# Altium PCB PCB1.PcbDoc
Units mil, origin at the board's own origin, x right, y up, seen from the top; angles counter-clockwise.
Board outline 1000 x 1410 mil, 2 copper layers (Top Layer, Bottom Layer); 26 components, 22 nets, 121 pads, 9 vias.
Unrouted connection lines stored in the file: 48.
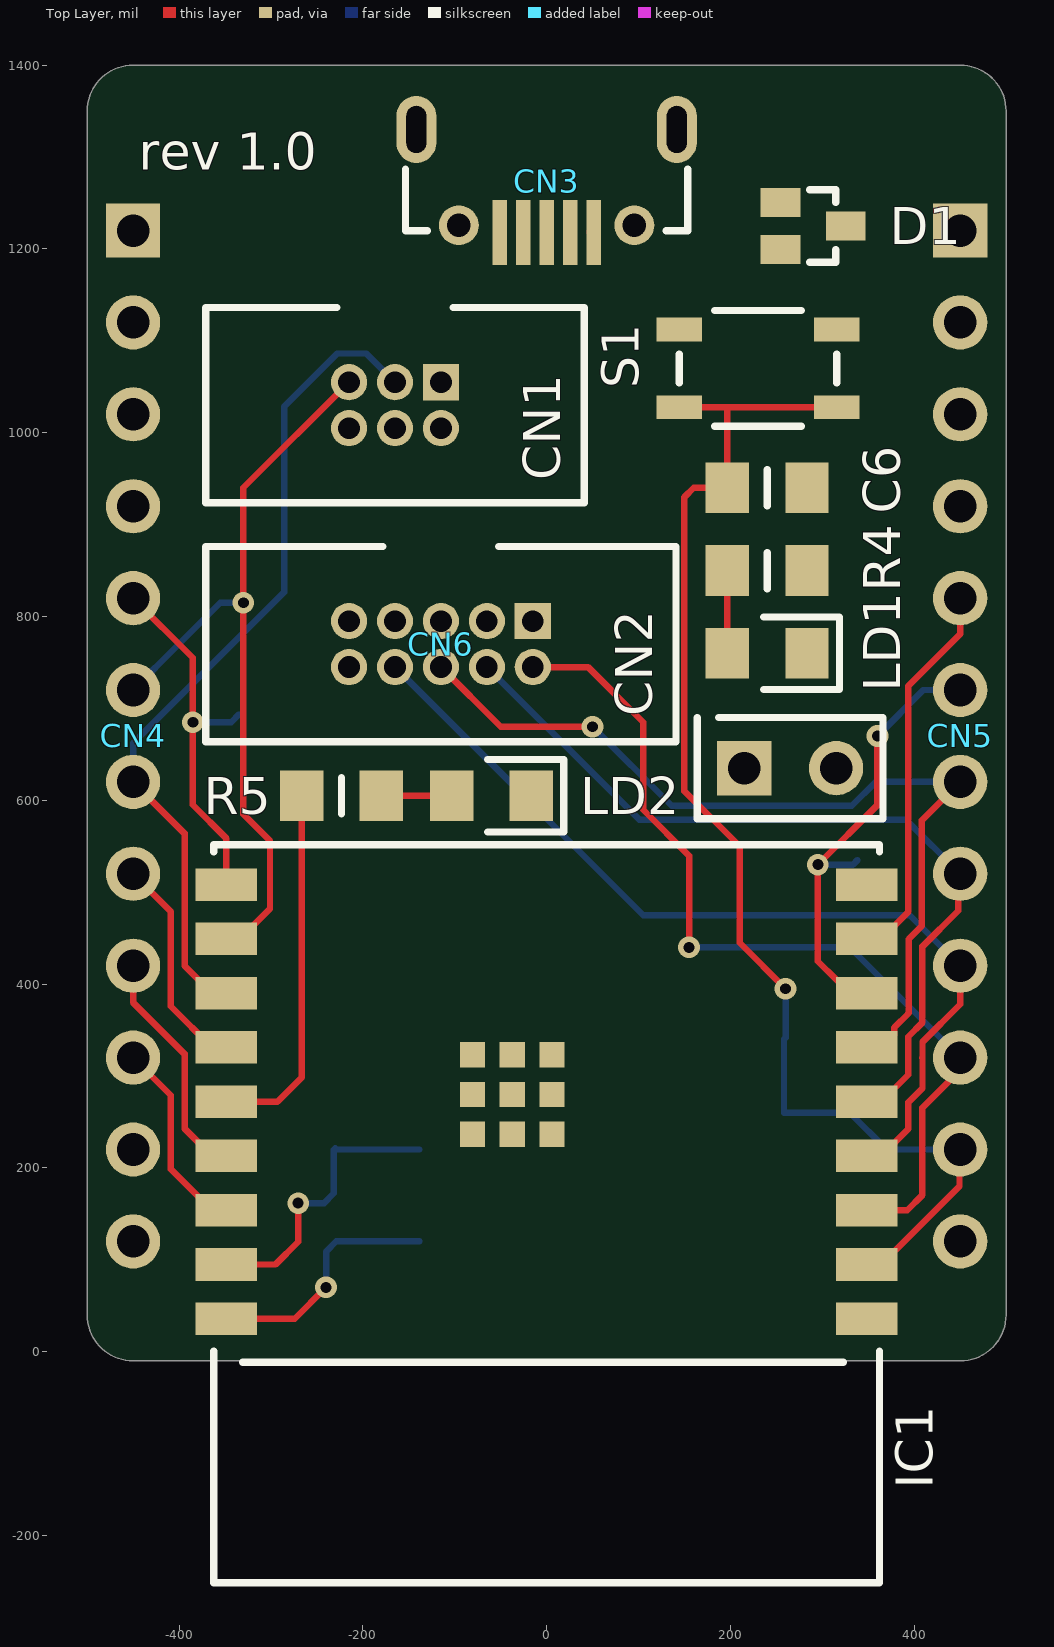
[diagram p0: Top Layer view]
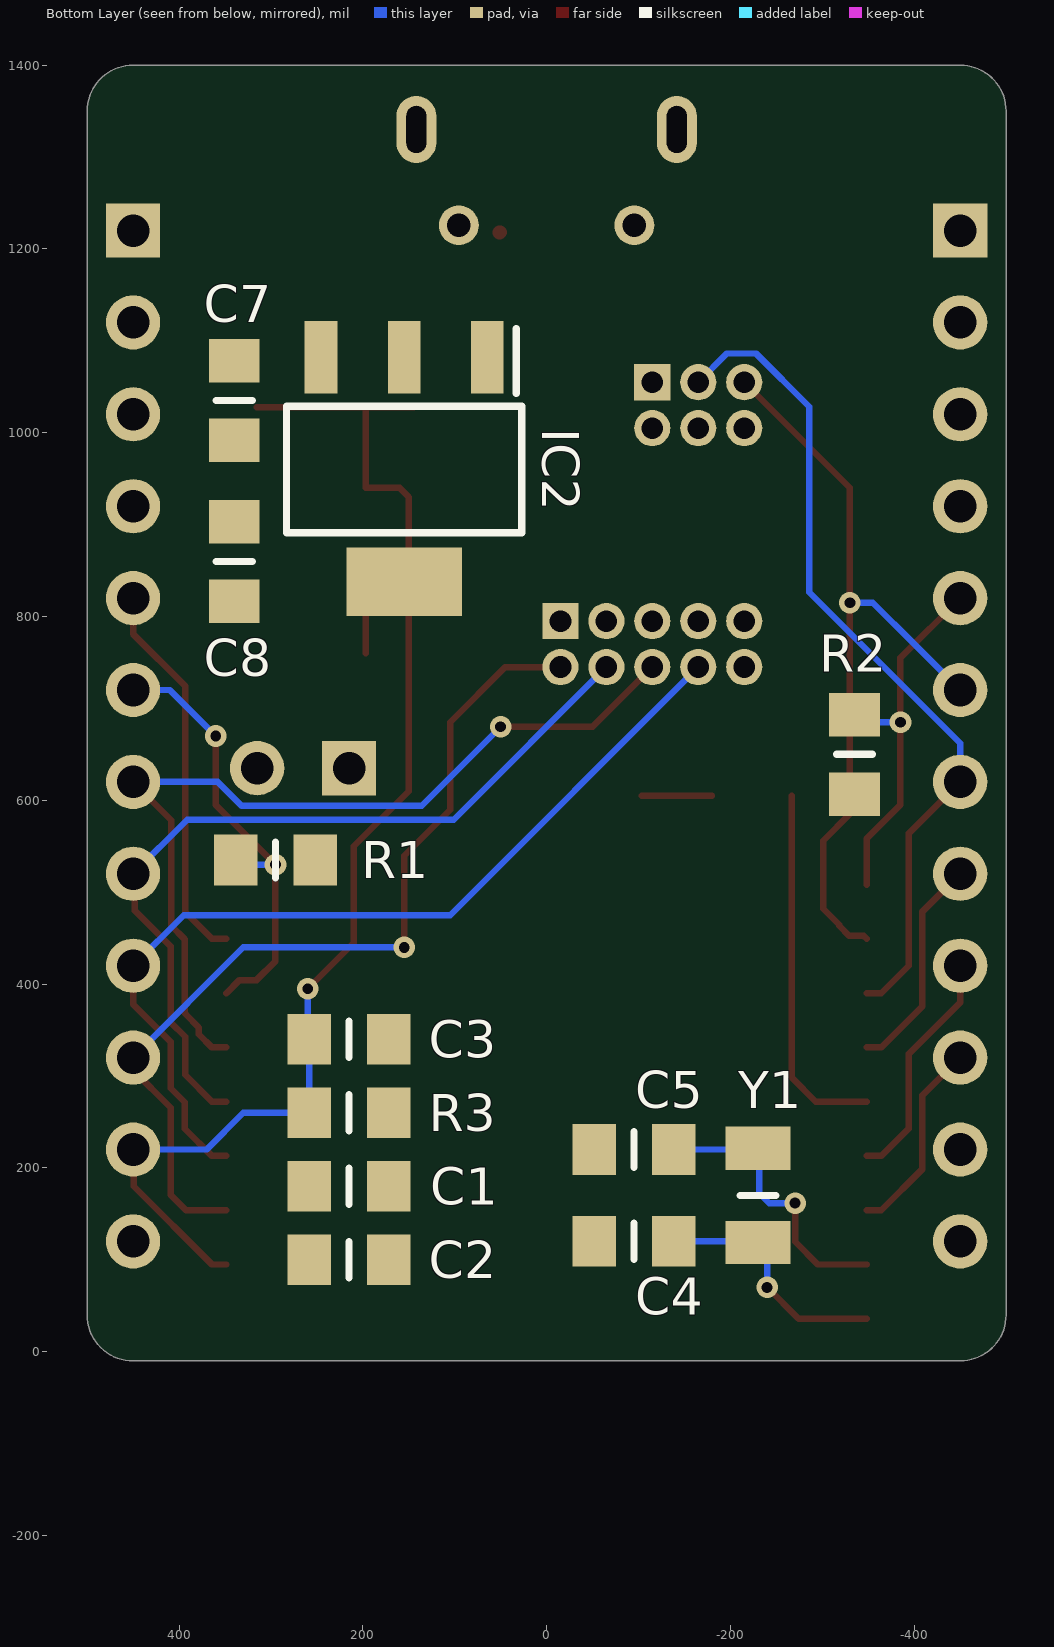
[diagram p1: Bottom Layer view, seen from below]
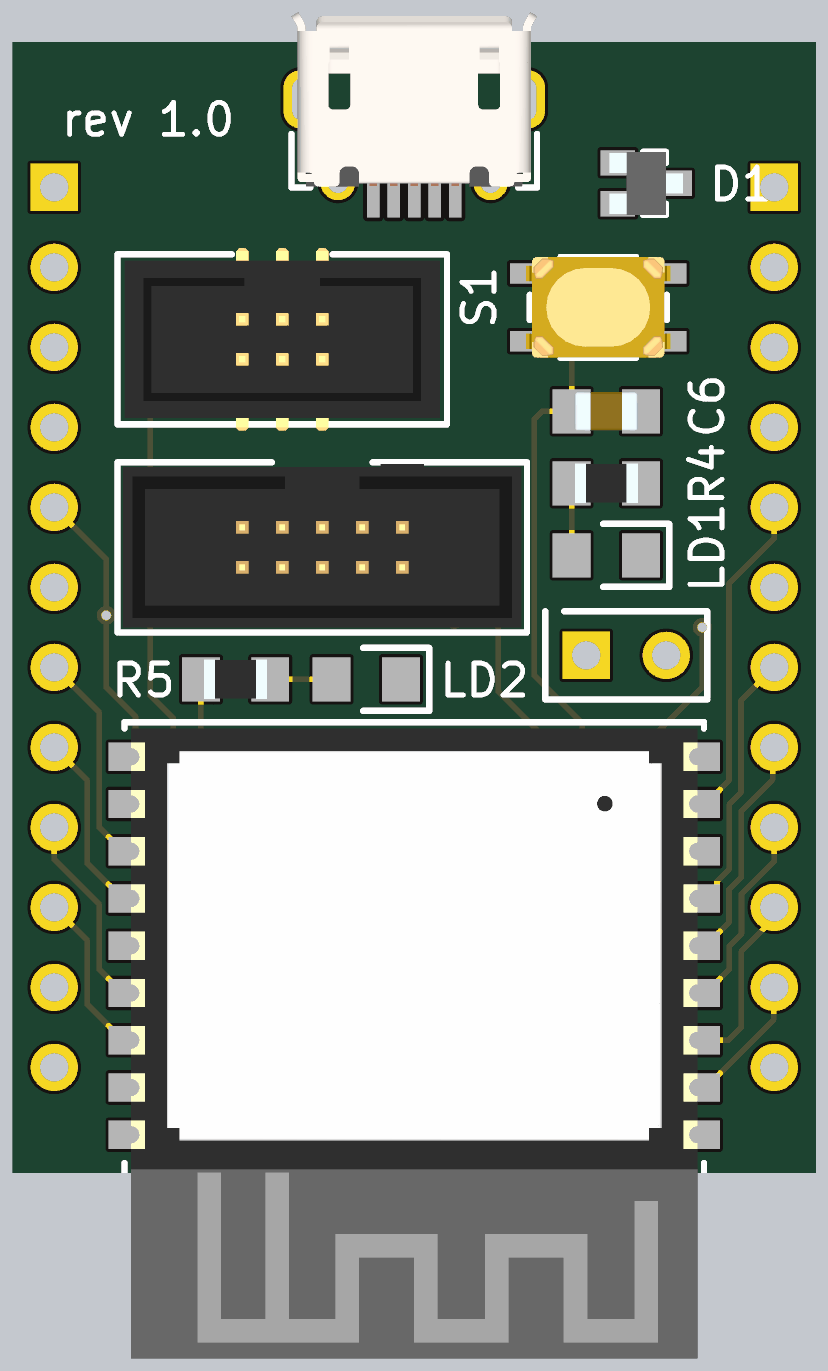
[diagram p2: 3D render of the assembled board from above, using the file's embedded part models]
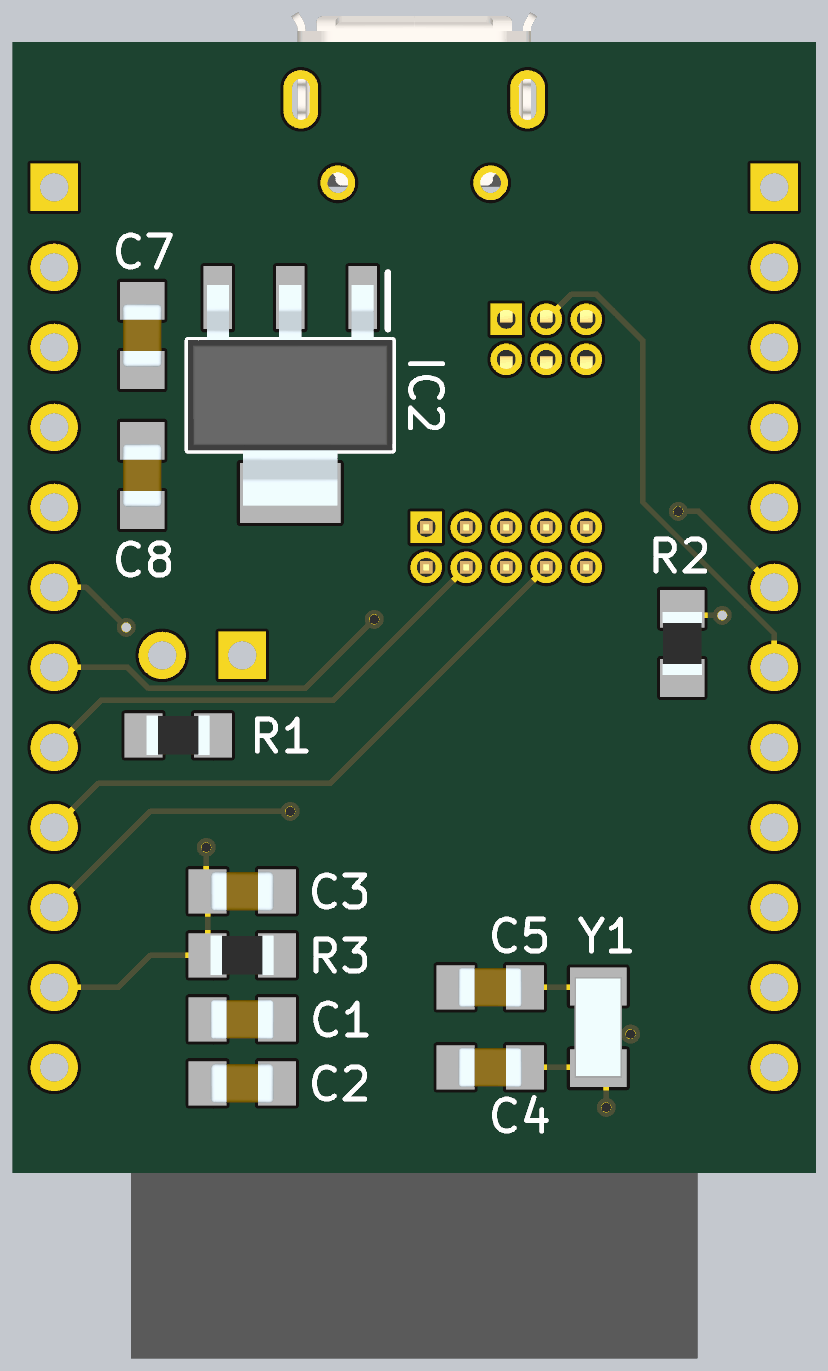
[diagram p3: 3D render of the assembled board from below, using the file's embedded part models]

## Layer stack, top to bottom
Top Solder: solder mask 0.4, Solder Resist, Dk 3.5
Top Layer: signal copper 1.4
Dielectric 1: dielectric 12.6, FR-4, Dk 4.8
Bottom Layer: signal copper 1.4
Bottom Solder: solder mask 0.4, Solder Resist, Dk 3.5

## Board outline
-500,40 -500,1350 cw(c-450,1350) -450,1400 450,1400 cw(c450,1350) 500,1350 500,40 cw(c450,40) 450,-10 -450,-10 cw(c-450,40)

## Design rules (kind name [scope] priority, off if disabled: settings)
BoardOutlineClearance [All] p1: gap=7.87 ignorepadtopadclearanceinfootprint=FALSE except(15.75: Arc-SplitBarrior Arc-SplitContinuation Track-SplitBarrior Track-SplitContinuation SMDPad-SplitBarrior SMDPad-SplitContinuation THPad-SplitBarrior THPad-SplitContinuation Via-SplitBarrior Via-SplitContinuation Fill-SplitBarrior Fill-SplitContinuation Poly-SplitBarrior Poly-SplitContinuation Region-SplitBarrior Region-SplitContinuation Text-SplitBarrior Text-SplitContinuation)
Clearance "Clearance Bottom Layer" [OnLayer('Bottom Layer')] p1: gap=8 ignorepadtopadclearanceinfootprint=TRUE except(10: Arc-Text Track-Text SMDPad-Text THPad-Text Via-Text Fill-Text Poly-Text Region-Text Text-Text)
Clearance "Clearance Top Layer" [OnLayer('Top Layer')] p2: gap=8 ignorepadtopadclearanceinfootprint=TRUE except(10: Arc-Text Track-Text SMDPad-Text THPad-Text Via-Text Fill-Text Poly-Text Region-Text Text-Text)
Clearance [All] p3: gap=7.87 ignorepadtopadclearanceinfootprint=FALSE except(3.5: Arc-Arc Arc-Track Arc-SMDPad Track-Track Track-SMDPad SMDPad-SMDPad; 5: Arc-Via Track-Via SMDPad-Via THPad-Via Via-Via; 10: Arc-Text Track-Text SMDPad-Text THPad-Text Via-Text Fill-Text Poly-Text Region-Text Text-Text)
HoleSize [All] p1: absolutevalues=TRUE maxlimit=248.03 minlimit=7.87 maxpercent=80.000 minpercent=20.000
MinimumAnnularRing [All] p1: minimumring=3
MinimumSolderMaskSliver [All] p1: minsoldermaskwidth=3.94
PolygonConnect PolygonConnect_1 [All] p1: thpad.connectstyle=Relief thpad.reliefconductorwidth=20 thpad.reliefentries=4 thpad.polygonreliefangle="90 Angle" thpad.airgapwidth=10 smdpad.connectstyle=Relief smdpad.reliefconductorwidth=20 smdpad.reliefentries=4 smdpad.polygonreliefangle="90 Angle" smdpad.airgapwidth=10 via.connectstyle=Direct via.reliefconductorwidth=20 via.reliefentries=4 via.polygonreliefangle="90 Angle" via.airgapwidth=10
RoutingCorners [All] p1: cornerstyle=Round minsetback=100 maxsetback=100
RoutingVias [All] p1: holewidth=11.81 width=19.68 viastyle="Through Hole" minholewidth=7.87 minwidth=17.72 maxholewidth=39.37 maxwidth=78.74
SilkToSilkClearance [All] p1: silktosilkclearance=3.94
SilkToSolderMaskClearance [IsPad] p1: minsilkscreentomaskgap=3.94 clearancetoexposedcopper=TRUE
SolderMaskExpansion [All] p1: expansion=4 istentingtop=FALSE
Width [All] p1: maxlimit=100 minlimit=5 preferedwidth=10 toplayer_prefwidth=7 minimp=50.000000 maximp=50.000000 favimp=50.000000
25 further rules are at their usual default settings.

## Components (designator, comment, footprint, x,y, rotation, side; value= is the part's Value field where it differs from the comment)
C1 "CL21B104KBCNNNC" CAPC2012X94N 215,180 r0 bottom value=100nF
C2 "CL21A106MQFNNNE" CAPC2012X135N 215,100 r0 bottom value=10uF
C3 "CL21B105KBFNNNE" CAPC2012X135N 215,340 r0 bottom value=1uF
C4 "CC0805CRNPO9BN6R8" CAPC2012X94N -95,120 r180 bottom value=6.8pF
C5 "CC0805CRNPO9BN6R8" CAPC2012X94N -95,220 r180 bottom value=6.8pF
C6 "CL21B104KBCNNNC" CAPC2012X94N 240,940 r180 top value=100nF
C7 "CL21B105KBFNNNE" CAPC2012X135N 340,1035 r270 bottom value=1uF
C8 "CL21A475KBQNNNE" CAPC2012X135N 340,860 r90 bottom value=4.7uF
CN1 "CN_2X3_1.27_BOX_1" CN_2X3_1.27_BOX_TH -165,1030 r180 top
CN2 "CN_2PIN" CN_2PIN 215,635 r0 top
CN3 "USB_B_AE" USB_B_AE 0,1330 r180 top
CN4 "CN_12PIN" CN_12PIN -450,1220 r270 top
CN5 "CN_12PIN" CN_12PIN 450,1220 r270 top
CN6 "CN_2X5_1.27_BOX" CN_2X5_1.27_BOX_TH -115,770 r180 top
D1 "RB715UMTL" DAN217UMTL 290,1225 r270 top
IC1 "ESP32-C3-WROOM-02-N4" ESP32C3WROOM02N4 0,150 r180 top
IC2 "AP7361-33ER-13" SOT230P700X180-4N 155,960 r270 bottom value=3.3V
LD1 "LTST-C171KGKT" LEDC2012X85N_G 240,760 r180 top value=Green/20mA
LD2 "LTST-C171KSKT" LEDC2012X85N_Y -60,605 r180 top value=Yellow
R1 "RC0805FR-0710KL" RESC2012X60N 295,535 r0 bottom value=10k
R2 "RC0805FR-0710KL" RESC2012X60N -335,650 r270 bottom value=10k
R3 "RC0805FR-0710KL" RESC2012X60N 215,260 r180 bottom value=10k
R4 "RC0805FR-0710KL" RESC2012X60N 240,850 r180 top value=10k
R5 "RC0805FR-0710KL" RESC2012X60N -223.31,605 r180 top value=10k
S1 "SKRPABE010" PTS815SJM250SMTRLFS 230,1070 r0 top
Y1 "Q13FC1350000200" Q13FC1350000200 -230,170 r90 bottom value=32.768kHz/7pF/70kOhms

## Footprints (in the part's own frame and the unit in brackets; to place one, negate y for a bottom-side part, rotate by r counter-clockwise, add the part's x,y. Pads: shape width x height; smd on the part's side, far side on the other; paste and mask are expansions set on the pad)
CAPC2012X94N [mm] "Capacitor"
  rect 1.2x1.4 smd: 1(-1.1,0) 2(1.1,0)
  silkscreen extent 0,-0.5 0,0.5, body extent -1,-0.63 1,0.63, height 0.94
CAPC2012X135N [mm] "Capacitor"
  rect 1.2x1.4 smd: 1(-1.1,0) 2(1.1,0)
  silkscreen extent 0,-0.5 0,0.5, body extent -1,-0.63 1,0.63, height 1.35
CN_2PIN [mm] "Connector"
  rect 1.5x1.5 hole 0.9: 1(0,0)
  round 1.5 hole 0.9: 2(2.54,0)
  silkscreen extent -1.3,-1.4 3.84,1.4, body extent -1.17,-1.25 3.91,1.25, height 8.2
CN_2X3_1.27_BOX_TH [mm] "Connector"
  rect 1x1 hole 0.6: 1(-1.27,-0.635)
  round 1 hole 0.6: 2(0,-0.635) 3(1.27,-0.635) 4(1.27,0.635) 5(0,0.635) 6(-1.27,0.635)
  silkscreen extent -5.23,-2.7 5.23,2.7, body extent -5,-2.9 5,2.9, height 4.9
CN_2X5_1.27_BOX_TH [mm] "Connector"
  rect 1x1 hole 0.6: 1(-2.54,-0.635)
  round 1 hole 0.6: 2(-1.27,-0.635) 3(0,-0.635) 4(1.27,-0.635) 5(2.54,-0.635) 6(2.54,0.635) 7(1.27,0.635) 8(0,0.635) 9(-1.27,0.635) 10(-2.54,0.635)
  silkscreen extent -6.5,-2.7 6.5,2.7, body extent -6.32,-2.65 6.32,2.55, height 5.4
CN_12PIN [mm] "Connector"
  rect 1.5x1.5 hole 0.9: 1(0,0)
  round 1.5 hole 0.9: 2(2.54,0) 3(5.08,0) 4(7.62,0) 5(10.16,0) 6(12.7,0) 7(15.24,0) 8(17.78,0) 9(20.32,0) 10(22.86,0) 11(25.4,0) 12(27.94,0)
  body extent -1.17,-1.25 29.31,1.25, height 2.59
DAN217UMTL [mm]
  rect 0.8x1.1 smd: 1(-0.65,-0.9) 2(0.65,-0.9) 3(0,0.9)
  silkscreen extent -1,-0.1 1,0.63, body extent -1,-1.17 1,1.17, height 1.1
ESP32C3WROOM02N4 [mm] "Module"
  rect 1.7x0.9 smd: 1(-8.85,2.9) 2(-8.85,1.4) 3(-8.85,-0.1) 4(-8.85,-1.6) 5(-8.85,-3.1) 6(-8.85,-4.6) 7(-8.85,-6.1) 8(-8.85,-7.6) 9(-8.85,-9.1) 10(8.85,-9.1) 11(8.85,-7.6) 12(8.85,-6.1) 13(8.85,-4.6) 14(8.85,-3.1) 15(8.85,-1.6) 16(8.85,-0.1) 17(8.85,1.4) 18(8.85,2.9)
  rect 0.7x0.7 smd: 19(0.95,-3.3) 20(2.05,-3.3) 21(2.05,-2.2) 22(0.95,-2.2) 23(-0.15,-2.2) 24(-0.15,-3.3) 25(-0.15,-4.4) 26(0.95,-4.4) 27(2.05,-4.4)
  silkscreen extent -9.2,-10.2 9.2,10.2, body extent -9,-10 9,10, height 3.2
LEDC2012X85N_G [mm] "LED Green"
  rect 1.2x1.4 smd: 1(-1.1,0) 2(1.1,0)
  silkscreen extent -2,-1 0.1,1, body extent -1,-0.63 1,0.63, height 1.1
LEDC2012X85N_Y [mm] "LED Yellow"
  rect 1.2x1.4 smd: 1(-1.1,0) 2(1.1,0)
  silkscreen extent -2,-1 0.1,1, body extent -1,-0.63 1,0.63, height 1.1
PTS815SJM250SMTRLFS [mm] "Switch"
  rect 1.25x0.65 smd: 1(-2.175,1.075) 2(2.175,1.075) 3(-2.175,-1.075) 4(2.175,-1.075)
  silkscreen extent -2.17,-1.6 2.17,1.6, body extent -2.3,-1.6 2.3,1.6, height 2.64
Q13FC1350000200 [mm] "Crystal"
  rect 1.2x1.8 smd: 1(-1.3,0) 2(1.3,0)
  silkscreen extent 0,-0.5 0,0.5, body extent -1.6,-0.75 1.6,0.75, height 0.9
RESC2012X60N [mm] "Resistor"
  rect 1.2x1.4 smd: 1(-1.1,0) 2(1.1,0)
  silkscreen extent 0,-0.5 0,0.5, body extent -1,-0.63 1,0.63, height 0.6
SOT230P700X180-4N [mm] "LDO"
  rect 2x0.9 smd: 1(-3.1,2.3) 2(-3.1,0) 3(-3.1,-2.3)
  rect 1.9x3.2 smd: 4(3.1,0)
  silkscreen extent -3.9,-3.25 1.75,3.25, body extent -3.5,-3.25 3.5,3.25, height 1.8
USB_B_AE [mm] "USB"
  rect 0.4x1.8 smd mask+0.125: 1(-1.3,2.85) 2(-0.65,2.85) 3(0,2.85) 4(0.65,2.85) 5(1.3,2.85)
  round 1.1 hole 0.65: S1(2.425,2.65) S4(-2.425,2.65)
  oval 1.1x1.85 hole 0.55 slot 1.3 at 90 deg: S2(3.6,0) S3(-3.6,0)
  silkscreen extent -3.9,1.1 3.9,2.8, body extent -3.9,-2.77 3.9,2.77, height 2.49

## Part data
C1 C6: "Capacitor", Manufacturer_Name="Samsung Electro-Mechanics", Mouser Part Number=187-CL21B104KBCNNNC, Arrow Part Number=CL21B104KBCNNNC, Arrow Price/Stock=https://www.arrow.com/en/products/cl21b104kbcnnnc/samsung-electro-mechanics?region=europe, Datasheet Link=https://datasheet.datasheetarchive.com/originals/distributors/Datasheets_SAMA/86a3eaf0882763ef32124d5901f9b833.pdf, Height=0.95mm, Manufacturer_Part_Number=CL21B104KBCNNNC, Mouser Price/Stock=https://www.mouser.co.uk/ProductDetail/Samsung-Electro-Mechanics/CL21B104KBCNNNC?qs=349EhDEZ59pEfpnm5yBEmQ%3D%3D
C2: "Capacitor", Manufacturer_Name="Samsung Electro-Mechanics", Mouser Part Number=187-CL21A106MQFNNNE, Arrow Part Number=CL21A106MQFNNNE, Arrow Price/Stock=https://www.arrow.com/en/products/cl21a106mqfnnne/samsung-electro-mechanics, Datasheet Link=https://componentsearchengine.com/Datasheets/2/CL21A106MQFNNNE.pdf, Height=1.35mm, Manufacturer_Part_Number=CL21A106MQFNNNE, Mouser Price/Stock=https://www.mouser.co.uk/ProductDetail/Samsung-Electro-Mechanics/CL21A106MQFNNNE?qs=yOVawPpwOwn3DWwGbD%252BRZA%3D%3D
C3 C7: "Capacitor", Manufacturer_Name="Samsung Electro-Mechanics", Mouser Part Number=187-CL21B105KBFNNNE, Arrow Part Number=CL21B105KBFNNNE, Arrow Price/Stock=https://www.arrow.com/en/products/cl21b105kbfnnne/samsung-electro-mechanics?region=europe, Datasheet Link=https://componentsearchengine.com/Datasheets/2/CL21B105KBFNNNE.pdf, Height=1.35mm, Manufacturer_Part_Number=CL21B105KBFNNNE, Mouser Price/Stock=https://www.mouser.co.uk/ProductDetail/Samsung-Electro-Mechanics/CL21B105KBFNNNE?qs=yOVawPpwOwmddQEBPU6Y9A%3D%3D
C4 C5: "Capacitor", Manufacturer_Name="YAGEO (PHYCOMP)", Mouser Part Number=603-CC805CRNPO9BN6R8, Datasheet Link=https://componentsearchengine.com/Datasheets/1/CC0805CRNPO9BN6R8.pdf, Height=0.7mm, Manufacturer_Part_Number=CC0805CRNPO9BN6R8, Mouser Price/Stock=https://www.mouser.co.uk/ProductDetail/YAGEO/CC0805CRNPO9BN6R8?qs=5q%252BqlK8CmJQXpKtionjueA%3D%3D
C8: "Capacitor", Manufacturer_Name="Samsung Electro-Mechanics", Mouser Part Number=187-CL21A475KBQNNNE, Datasheet Link=https://www.mouser.fr/datasheet/2/585/MLCC-1837944.pdf, Height=1.35mm, Manufacturer_Part_Number=CL21A475KBQNNNE
CN1 CN2 CN4 CN5 CN6: "Connector"
CN3: "USB connector"
D1: "Schottky Diode", Manufacturer_Name="ROHM Semiconductor", Mouser Part Number=755-RB715UMTL, Datasheet Link=http://uk.rs-online.com/web/p/products/1835297, Height=1mm, Manufacturer_Part_Number=RB715UMTL, Mouser Price/Stock=https://www.mouser.co.uk/ProductDetail/ROHM-Semiconductor/RB715UMTL?qs=HXFqYaX1Q2wTXMfu8QxCQg%3D%3D
IC1: "Integrated Circuit", Manufacturer_Name="Espressif Systems", Mouser Part Number=356-ESP32C3WROOM02N4, Datasheet Link=https://www.mouser.ch/datasheet/2/891/Espressif_ESP32_C3_WROOM_02-2006871.pdf, Height=3.35mm, Manufacturer_Part_Number=ESP32-C3-WROOM-02-N4, Mouser Price/Stock=https://www.mouser.co.uk/ProductDetail/Espressif-Systems/ESP32-C3-WROOM-02-N4?qs=stqOd1AaK7%2FqjTZKEOgfUg%3D%3D
IC2: "LDO", Manufacturer_Name="Diodes Inc.", Mouser Part Number=621-AP7361-33ER-13, Arrow Part Number=AP7361-33ER-13, Arrow Price/Stock=https://www.arrow.com/en/products/ap7361-33er-13/diodes-incorporated?region=nac, Datasheet Link=https://www.diodes.com/assets/Datasheets/AP7361.pdf, Height=1.8mm, Manufacturer_Part_Number=AP7361-33ER-13, Mouser Price/Stock=https://www.mouser.co.uk/ProductDetail/Diodes-Incorporated/AP7361-33ER-13?qs=gfe7vQ8txpWHFbeC09g4Zw%3D%3D
LD1: "LED", Manufacturer_Name=Lite-On, Mouser Part Number=859-LTST-C171KGKT, Arrow Part Number=LTST-C171KGKT, Arrow Price/Stock=https://www.arrow.com/en/products/ltst-c171kgkt/lite-on-technology?region=nac, Datasheet Link=https://optoelectronics.liteon.com/upload/download/DS22-2000-118/LTST-C171KGKT.pdf, Height=0.9mm, Manufacturer_Part_Number=LTST-C171KGKT, Mouser Price/Stock=https://www.mouser.co.uk/ProductDetail/Lite-On/LTST-C171KGKT?qs=j1zysehuyChA38z%2F%252BFfUSw%3D%3D
LD2: "LED", Manufacturer_Name=Lite-On, Mouser Part Number=859-LTST-C171KSKT, Arrow Part Number=LTST-C171KSKT, Arrow Price/Stock=https://www.arrow.com/en/products/ltst-c171kskt/lite-on-technology?region=nac, Datasheet Link=https://componentsearchengine.com/Datasheets/1/LTST-C171KSKT.pdf, Height=0.9mm, Manufacturer_Part_Number=LTST-C171KSKT, Mouser Price/Stock=https://www.mouser.co.uk/ProductDetail/Lite-On/LTST-C171KSKT?qs=llMtm9xcdM0CwR1bByTaUQ%3D%3D
R1 R2 R3 R4 R5: "Resistor", Manufacturer_Name="YAGEO (PHYCOMP)", Mouser Part Number=603-RC0805FR-0710KL, Arrow Part Number=RC0805FR-0710KL, Arrow Price/Stock=https://www.arrow.com/en/products/rc0805fr-0710kl/yageo?region=europe, Datasheet Link=https://datasheet.datasheetarchive.com/originals/distributors/Datasheets_SAMA/902f9e387b938f871d31120f5fc1d65e.pdf, Height=0.6mm, Manufacturer_Part_Number=RC0805FR-0710KL, Mouser Price/Stock=https://www.mouser.co.uk/ProductDetail/YAGEO/RC0805FR-0710KL?qs=7bY8808IzHq6vrU3BeiiYw%3D%3D
S1: "Switch", Manufacturer_Name="ALPS Electric", Mouser Part Number=688-SKRPAB, Datasheet Link=https://datasheet.lcsc.com/szlcsc/ALPS-Electric-SKRPABE010_C115360.pdf, Height=2.5mm, Manufacturer_Part_Number=SKRPABE010, Mouser Price/Stock=https://www.mouser.co.uk/ProductDetail/Alps-Alpine/SKRPABE010?qs=m0BA540hBPe1GpcSf%2FZ5Yw%3D%3D
Y1: "Crystal", Manufacturer_Name="SEIKO EPSON", Datasheet Link=https://datasheet.lcsc.com/szlcsc/Seiko-Epson-Q13FC1350000200_C48615.pdf, Height=0.9mm, Manufacturer_Part_Number=Q13FC1350000200

## Via types
v1: diameter 23.62, hole 11.81, Top Layer to Bottom Layer, tented both sides, 9 vias

## Nets (pads, with @x,y where several pads share a name; then routed paths per layer and width w, separated by ;. In a path a pad name is that pad's centre, name@x,y a point inside that pad or via, vN(x,y) a via of type N, cw(c..) or ccw(c..) an arc to the next point about the centre after c; other vN are vias at no path point)
3V3: C8.2 CN1.6 CN2.1 CN4.3 CN5.3 CN6.1 D1.2 IC2.2 IC2.4 R4.1
GND: C1.1 C2.1 C3.1 C4.1 C5.1 C6.1 C7.1 C8.1 CN1.5 CN3.5 CN3.S1 CN3.S2 CN3.S3 CN3.S4 CN4.2 CN4.4 CN4.11 CN4.12 CN5.2 CN5.4 CN5.12 CN6.2 CN6.3 CN6.4 CN6.5 IC1.9 IC2.1 LD1.1 LD2.1 R2.2 S1.1 S1.2
IO2: CN4.10 IC1.16 | length 217.4
  Top Layer w7: CN4.10 -408.97,278.97 -408.97,198.74 -364.17,153.94 IC1.16
IO3: CN4.9 IC1.15 | length 258.3
  Top Layer w7: CN4.9 -450,380 -393.97,323.97 -393.97,242.79 -364.17,212.99 IC1.15
IO8: CN4.5 IC1.10 R2.1 | length 407.2
  Top Layer w7: CN4.5 -385,755 v1(-385,685) -385,595 -348.43,558.43 IC1.10
  Bottom Layer w7: v1(-385,685) -343.31,685 R2.1
IO9: CN5.5 IC1.8 | length 422.1
  Top Layer w7: IC1.8 364.17,449.21 393.39,478.43 393.39,724.39 450,781 CN5.5
IO10: CN5.6 IC1.7 R1.2 | length 495.6
  Top Layer w7: IC1.7 334.21,404.37 315.63,404.37 295.13,424.87 v1(295.13,530) 360,594.87 v1(360,670)
  Bottom Layer w7: v1(295.13,530) 333.31,530 R1.2 ; v1(360,670) 410,720 CN5.6
IO18: CN4.8 IC1.13 | length 240.2
  Top Layer w7: CN4.8 -408.97,478.97 -408.97,375.9 -364.17,331.1 IC1.13
IO19: IC1.14 R5.2 | length 399.3
  Top Layer w7: IC1.14 -292.95,272.05 -266.61,298.39 R5.2
NetC4_2: C4.2 IC1.18 Y1.1 | length 267.7
  Top Layer w7: IC1.18 -274.17,35.83 v1(-240,70)
  Bottom Layer w7: v1(-240,70) -240,108.82 -228.82,120 C4.2
NetC5_2: C5.2 IC1.17 Y1.2 | length 314.8
  Top Layer w7: IC1.17 -295.12,94.88 -270.42,119.58 v1(-270.42,161.61)
  Bottom Layer w7: v1(-270.42,161.61) -242.21,161.61 -231.58,172.24 -231.58,219.6 Y1.2 ; Y1.2@-230,220 C5.2
NetLD1_2: LD1.2 R4.2 | length 90
  Top Layer w7: LD1.2 R4.2
NetLD2_2: LD2.2 R5.1 | length 76.7
  Top Layer w7: R5.1 LD2.2
RST: C3.2 C6.2 CN5.11 IC1.2 R3.1 S1.3 S1.4 | length 1411.4
  Top Layer w7: S1.3 195,1027.68 ; v1(260,395) 210,445 210,550 150,610 150,930 160,940 C6.2 196.69,1025.98 195,1027.68 ; S1.4 195,1027.68 ; IC1.2 364.17,94.88 449.26,179.97 449.26,219.26 CN5.11
  Bottom Layer w7: v1(260,395) 260,341.69 C3.2 R3.1 330,260 370,220 CN5.11
RX: CN1.3 CN4.6 IC1.11 | length 853.7
  Top Layer w7: IC1.11 -345.2,452.44 -329.45,452.44 -318.46,463.43 -318.46,464.54 -301,482 -301,556 -330,585 v1(-330,815) -330,940 CN1.3
  Bottom Layer w7: CN4.6 -400.23,769.77 -355,815 v1(-330,815)
TCK: CN5.8 CN6.9 IC1.5 | length 907.4
  Top Layer w7: IC1.5 364.17,272.05 393.39,301.26 393.39,342.62 408.97,358.21 408.97,440.97 447.97,479.97 447.97,517.97 CN5.8
  Bottom Layer w7: CN6.9 101.03,578.97 391.03,578.97 CN5.8
TDI: CN5.9 CN6.7 IC1.4 | length 1007.9
  Top Layer w7: IC1.4 364.17,212.99 393.69,242.51 393.69,271.32 409,286.63 409,318.5 cw(c450,320) 409,321.5 409,337.02 450,378.02 CN5.9
  Bottom Layer w7: CN6.7 105,475 395,475 CN5.9
TDO: CN5.7 CN6.8 IC1.6 | length 978.5
  Top Layer w7: CN6.8 -50,680 v1(50,680) ; IC1.6 364.17,331.1 378.39,345.32 378.39,352.68 393.39,367.68 393.39,368.39 393.97,368.97 393.97,448.97 408.39,463.39 408.39,578.39 CN5.7
  Bottom Layer w7: v1(50,680) 136.03,593.97 331.99,593.97 358.02,620 CN5.7
TMS: CN5.10 CN6.10 IC1.3 | length 989.2
  Top Layer w7: CN6.10 45,745 105,685 105,589.75 155,539.75 v1(155,440) ; IC1.3 392.39,153.94 408.97,170.52 408.97,265.39 450,306.41 CN5.10
  Bottom Layer w7: v1(155,440) 330,440 CN5.10
TX: CN1.2 CN4.7 IC1.12 | length 915.2
  Top Layer w7: CN4.7 -393.97,563.97 -393.97,419.96 -364.17,390.16 IC1.12
  Bottom Layer w7: CN4.7 -450,661.98 -285.69,826.29 -285.69,1028.41 -227.92,1086.19 -196.19,1086.19 CN1.2
VBUS: C7.2 CN3.1 CN4.1 CN5.1 D1.3 IC2.3 | length 7.6
  Top Layer w15: CN3.1@50.81,1218.17 CN3.1 ; CN5.1@445,1225 CN5.1
VDD: C1.2 C2.2 CN2.2 IC1.1 R1.1 R3.2
pads on no net: CN1.1 CN1.4 CN3.2 CN3.3 CN3.4 CN6.6 D1.1 IC1.19 IC1.20 IC1.21 IC1.22 IC1.23 IC1.24 IC1.25 IC1.26 IC1.27

## Silkscreen, mask and mechanical layers (free items; w line width, h text height)
Top Overlay:
  text "rev 1.0" at -444,1286 h40
Board Shape:
  the board outline again, w0